# EAGLE board Watch-It-BOTTOM+ (EAGLE 9.5.1)
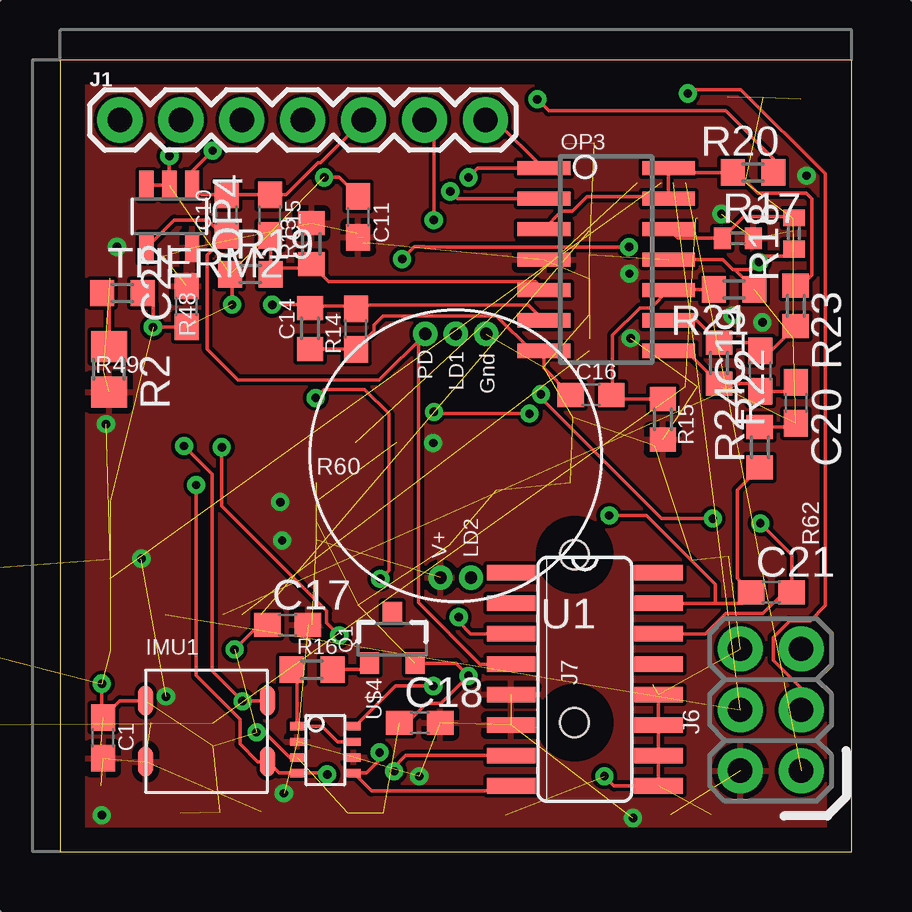
[diagram p0: board, top side]
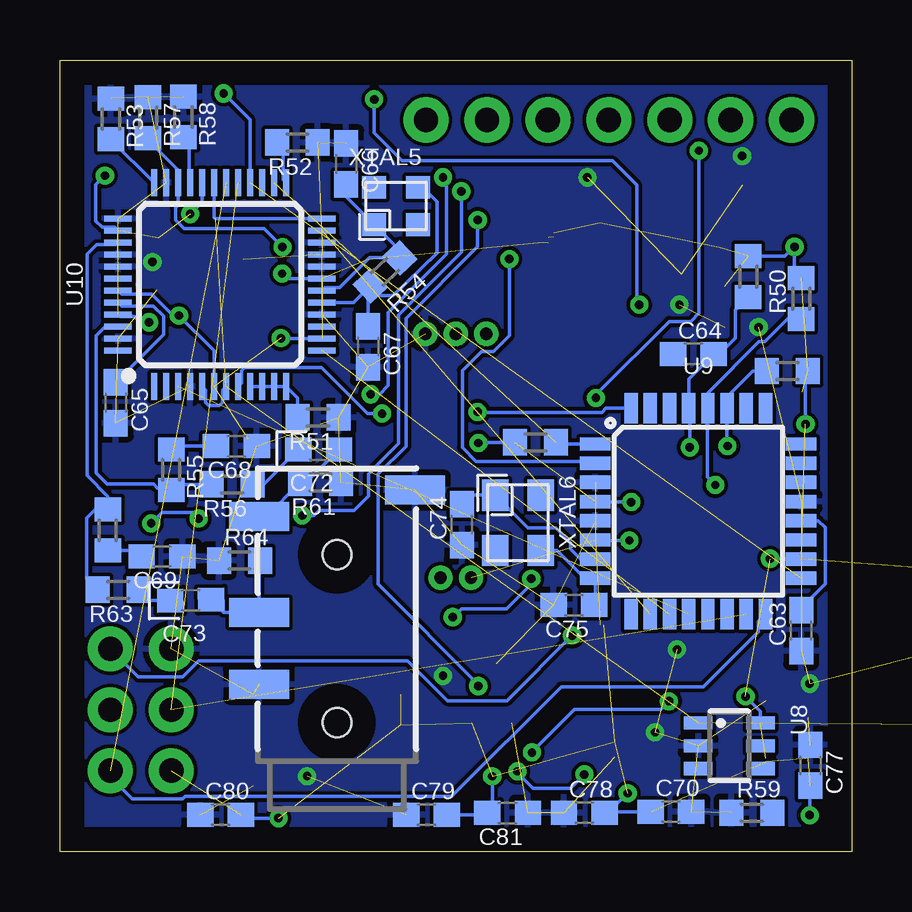
[diagram p1: board, bottom side, seen from below]

Size 33 x 33 mm. Coordinates in mm from the lower left corner, seen from the top.
Outline: 0,0 33,0 33,33 0,33 0,0
Copper layers (1*16): Top 0.035mm / dielectric 1.5mm / Bottom 0.035mm
Design rules "default": minimum track width 6mil, minimum drill 0.35mm, track to track 6mil, track to pad 6mil, pad to pad 6mil, via to via 6mil, smd to smd 6mil, copper to edge 40mil, drill to drill 6mil, minimum pad ring 10mil, minimum via ring 8mil, stop-mask expansion 4mil, vias tented up to drill 0mil, thermal gap 10mil

## Footprints (pad centres in the part's own frame; a part is rotated, then mirrored left to right if it is on the bottom)
C0603 = smd 1.1 x 1: 1 -0.85,0; 2 0.85,0
C0603.POLAR = smd 1.1 x 1: A 0.85,0; C -0.85,0
LSM6DS3_CAST = smd 0.635 x 1.27: 1 -2.54,1.27; 2 -2.54,-1.27; 3 2.54,-1.27; 4 2.54,1.27
1X07 = drill 1.016 pad 1.88: 1 0,0; 2 2.54,0; 3 5.08,0; 4 7.62,0; 5 10.16,0; 6 12.7,0; 7 15.24,0
2X3-NS = drill 1.016 pad 1.88: 1 -2.54,-1.27; 2 -2.54,1.27; 3 0,-1.27; 4 0,1.27; 5 2.54,-1.27; 6 2.54,1.27
AUDIO_JACK_3.5MM_TRRS_SMD_RA = smd 1.2 x 2.5: GND 3.2,3.25; GND/MIC 11.3,-3.25; LEFT 10.2,3.25; RIGHT 6.2,3.25 | hole 1.2: 1.6,0; 8.6,0
SO14 = smd 0.6 x 2.2: 1 -3.81,-2.6; 2 -2.54,-2.6; 3 -1.27,-2.6; 4 0,-2.6; 5 1.27,-2.6; 6 2.54,-2.6; 7 3.81,-2.6; 8 3.81,2.6; 9 2.54,2.6; 10 1.27,2.6; 11 0,2.6; 12 -1.27,2.6; 13 -2.54,2.6; 14 -3.81,2.6
SOT23-5 = smd 0.6 x 1.2: 1 -0.95,-1.306; 2 0,-1.306; 3 0.95,-1.306; 4 0.95,1.306; 5 -0.95,1.306
SOT23-3 = smd 0.8 x 0.9: 1 -0.95,-1; 2 0.95,-1; 3 0,1.1
R0805 = smd 1.3 x 1.5: 1 -0.95,0; 2 0.95,0
R0603 = smd 1 x 1.1: 1 -0.85,0; 2 0.85,0
R0402 = smd 0.7 x 0.9: 1 -0.65,0; 2 0.65,0
SO16 = smd 0.66 x 2.032: 1 -4.445,-3.073; 2 -3.175,-3.073; 3 -1.905,-3.073; 4 -0.635,-3.073; 5 0.635,-3.073; 6 1.905,-3.073; 7 3.175,-3.073; 8 4.445,-3.073; 9 4.445,3.073; 10 3.175,3.073; 11 1.905,3.073; 12 0.635,3.073; 13 -0.635,3.073; 14 -1.905,3.073; 15 -3.175,3.073; 16 -4.445,3.073
SOT23-6 = smd 0.55 x 1.2: 1 -0.95,-1.3; 2 0,-1.3; 3 0.95,-1.3; 4 0.95,1.3; 5 0,1.3; 6 -0.95,1.3
TQFP32-08 = smd 1.27 x 0.559: 1 -4.293,2.8; 2 -4.293,2; 3 -4.293,1.2; 4 -4.293,0.4; 5 -4.293,-0.4; 6 -4.293,-1.2; 7 -4.293,-2; 8 -4.293,-2.8; 17 4.293,-2.8; 18 4.293,-2; 19 4.293,-1.2; 20 4.293,-0.4; 21 4.293,0.4; 22 4.293,1.2; 23 4.293,2; 24 4.293,2.8 | smd 0.559 x 1.27: 9 -2.8,-4.293; 10 -2,-4.293; 11 -1.2,-4.293; 12 -0.4,-4.293; 13 0.4,-4.293; 14 1.2,-4.293; 15 2,-4.293; 16 2.8,-4.293; 25 2.8,4.293; 26 2,4.293; 27 1.2,4.293; 28 0.4,4.293; 29 -0.4,4.293; 30 -1.2,4.293; 31 -2,4.293; 32 -2.8,4.293
LQFP-48 = smd 0.254 x 1.143: 1 -2.75,-4.25; 2 -2.25,-4.25; 3 -1.75,-4.25; 4 -1.25,-4.25; 5 -0.75,-4.25; 6 -0.25,-4.25; 7 0.25,-4.25; 8 0.75,-4.25; 9 1.25,-4.25; 10 1.75,-4.25; 11 2.25,-4.25; 12 2.75,-4.25; 25 2.75,4.25; 26 2.25,4.25; 27 1.75,4.25; 28 1.25,4.25; 29 0.75,4.25; 30 0.25,4.25; 31 -0.25,4.25; 32 -0.75,4.25; 33 -1.25,4.25; 34 -1.75,4.25; 35 -2.25,4.25; 36 -2.75,4.25 | smd 1.143 x 0.254: 13 4.25,-2.75; 14 4.25,-2.25; 15 4.25,-1.75; 16 4.25,-1.25; 17 4.25,-0.75; 18 4.25,-0.25; 19 4.25,0.25; 20 4.25,0.75; 21 4.25,1.25; 22 4.25,1.75; 23 4.25,2.25; 24 4.25,2.75; 37 -4.25,2.75; 38 -4.25,2.25; 39 -4.25,1.75; 40 -4.25,1.25; 41 -4.25,0.75; 42 -4.25,0.25; 43 -4.25,-0.25; 44 -4.25,-0.75; 45 -4.25,-1.25; 46 -4.25,-1.75; 47 -4.25,-2.25; 48 -4.25,-2.75
PPG.MODULE.2 = drill 0.508 pad 0.94: GND 1.27,5.08; LD1 0,5.08; LD2 0.635,-5.08; PD -1.27,5.08; V+ -0.635,-5.08
SOT-23-8 = smd 0.35 x 0.6: 1 -0.991,-1.176; 2 -0.341,-1.176; 3 0.309,-1.176; 4 0.959,-1.176; 5 0.959,1.176; 6 0.309,1.176; 7 -0.341,1.176; 8 -0.991,1.176
4-SMD.NOLEAD = smd 1 x 0.95: GND1 0.925,-0.775; GND2 -0.925,0.775; XTAL1 -0.925,-0.775; XTAL2 0.925,0.775
4-SMD.NOLEAD.3.25MM-2.5MM = smd 1.3 x 1.1: GND1 1.15,-0.95; GND2 -1.15,0.95; XTAL1 -1.15,-0.95; XTAL2 1.15,0.95

## Placement (x,y rotation side)
C1  100n  [C0603]  1.79,4.74 270 top
C10  100n  [C0603]  6.95,26.53 90 top
C11  100n  [C0603]  12.44,26.46 270 top
C14  2.2n  [C0603]  12.33,21.78 90 top
C15  2.2u  [C0603]  8.75,26.53 270 top
C16  2.2u  [C0603]  22.14,19.04 0 top
C17  100n  [C0603]  9.49,9.44 0 top
C18  100n  [C0603]  15,5.37 0 top
C19  2.2n  [C0603]  29.2,20.03 90 top
C20  22u  [C0603]  30.67,18.71 270 top
C21  22n  [C0603]  29.66,10.81 0 top
C22  100n  [C0603]  5.27,22.72 90 top
C63  100n  [C0603]  2.1,9.21 90 bottom
C64  100n  [C0603]  6.59,20.74 0 bottom
C65  1u  [C0603]  30.67,18.71 270 bottom
C66  33p  [C0603]  21.07,28.67 270 bottom
C67  33p  [C0603]  20.16,21.05 270 bottom
C68  10n  [C0603]  25.64,16.91 180 bottom
C69  10n  [C0603]  28.74,12.31 180 bottom
C70  1u  [C0603]  7.53,1.67 0 bottom
C71  1u  [C0603]  -17.84,4.18 90 bottom  (outside the outline)
C72  10u  [C0603.POLAR]  22.21,16.75 180 bottom
C73  10u  [C0603.POLAR]  27.55,10.48 180.9 bottom
C74  33p  [C0603]  16.25,13.63 90 bottom
C75  33p  [C0603]  11.57,10.28 180 bottom
C76  100n  [C0603]  -8.72,10.53 90 bottom  (outside the outline)
C77  1u  [C0603]  1.72,3.6 270 bottom
C78  100n  [C0603]  11.14,1.61 0 bottom
C79  100n  [C0603]  17.72,1.54 0 bottom
C80  100n  [C0603]  26.3,1.54 0 bottom
C81  100n  [C0603]  14.34,1.61 180 bottom
C82  100n  [C0603]  -17.38,6.49 0 bottom  (outside the outline)
C83  1u  [C0603]  -15.63,5.17 0 bottom  (outside the outline)
C84  10u  [C0603.POLAR]  -10.27,8.19 0 bottom  (outside the outline)
C85  10u  [C0603.POLAR]  -9.89,5.15 90 bottom  (outside the outline)
C86  10u  [C0603.POLAR]  -19.54,3.65 90 bottom  (outside the outline)
C87  100n  [C0603]  -11.09,10.53 0 bottom  (outside the outline)
IMU1  LSM6DS3_CAST  [LSM6DS3_CAST]  6.11,5.02 0 top
J1  [1X07]  2.5,30.5 0 top
J6  AVR_SPI_PROG_3X2NS  [2X3-NS]  29.63,5.91 90 top
J7  [AUDIO_JACK_3.5MM_TRRS_SMD_RA]  21.45,3.77 90 bottom
OP3  [SO14]  22.77,24.68 270 top
OP4  [SOT23-5]  4.56,26.48 180 top
Q1  [SOT23-3]  13.86,8.85 0 top
R2  10k  [R0805]  2.05,20.11 270 top
R13  220k  [R0603]  10.48,25.34 90 top
R14  10M  [R0603]  10.43,21.81 270 top
R15  220k  [R0603]  25.14,18.02 270 top
R16  [R0603]  10.5,7.58 0 top
R17  10k  [R0402]  28.26,25.57 0 top
R18  10k  [R0402]  30.6,25.77 90 top
R19  220k  [R0603]  7.94,24.07 0 top
R20  1M  [R0603]  28.89,28.31 0 top
R21  220k  [R0603]  28.11,23.43 180 top
R22  10M  [R0603]  27.47,20.36 270 top
R23  1M  [R0603]  30.67,22.75 270 top
R24  10k  [R0603]  29.17,16.85 90 top
R48  10k  [R0603]  4.31,23.97 90 bottom
R49  10k  [R0603]  2.68,20.03 0 bottom
R50  10k  [R0603]  2.1,23.05 90 bottom
R51  100k  [R0603]  22.24,18.1 180 bottom
R52  100k  [R0603]  23.1,29.55 180 bottom
R53  100k  [R0603]  30.88,30.55 270 bottom
R54  1M  [R0603]  19.45,24.17 43.6 bottom
R55  20  [R0603]  28.36,15.91 270 bottom
R56  470  [R0603]  25.82,15.31 180 bottom
R57  100k  [R0603]  29.33,30.6 270 bottom
R58  100k  [R0603]  27.85,30.62 270 bottom
R59  100k  [R0603]  4.15,1.61 0 bottom
R60  100k  [R0603]  13.17,17.06 180 bottom
R61  10k  [R0603]  22.14,15.38 180 bottom
R62  20  [R0603]  31,13.4 90 bottom
R63  470  [R0603]  30.57,10.91 180 bottom
R64  10k  [R0603]  25.52,12.13 0 bottom
THERM2  10k  [R0603]  2.61,23.28 0 top
U1  AD5242-SO16  [SO16]  21.88,7.18 270 top
U8  [SOT23-6]  5.09,4.41 270 bottom
U9  ATMEGA328P_TQFP  [TQFP32-08]  6.39,14.19 0 bottom
U10  VS1053B  [LQFP-48]  26.33,23.64 0 bottom
U$3  [PPG.MODULE.2]  16.5,16.5 0 top
U$4  AD5171  [SOT-23-8]  11.06,4.23 270 top
XTAL5  12.288MHz  [4-SMD.NOLEAD]  18.99,26.91 0 bottom
XTAL6  8MHz  [4-SMD.NOLEAD.3.25MM-2.5MM]  13.91,13.71 270 bottom

## Library data of the parts
C1 C10 C11 C14-C22 C63-C87 R2 R13-R24 R48-R64 = LinnesLab-Passives
IMU1 THERM2 = LinnesLab-Sensors
J1 J6 U$3 = LinnesLab-Connectors
J7 = LinnesLab-Connectors; PROD_ID: CONN-10676; SF_ID: PRT-12639
OP3 OP4 = LinnesLab-AnalogIC
Q1 = LinnesLab-DiscreteSemi
U1 U$4 = LinnesLab-DigitalIC
U8 = LinnesLab-Power
U9 = LinnesLab-Microcontrollers; PROD_ID: IC-09069
U10 = LinnesLab-DigitalIC; PROD_ID: IC-12665
XTAL5 XTAL6 = LinnesLab-Clocks

## Nets
1.8V: C71.1 C82.2 C83.2 C86.A U8.1 U10.5 U10.7 U10.24 U10.31
3.3V: C1.2 C11.2 C17.2 C18.2 C22.2 C70.1 C76.2 C77.2 C78.2 C79.2 C80.2 C81.2 C84.A C85.A C87.2 IMU1.2 J6.2 OP3.4 OP4.5 R2.2 R13.2 R15.2 R17.2 R48.2 R49.2 R50.2 R60.2 U1.5 U1.6 U8.6 U9.4 U9.6 U9.18 U10.6 U10.14 U10.19 U10.32 U10.38 U10.43 U10.45 U$3.V+ U$4.2 U$4.6
A0: U9.23
A1: U9.24
A2: U9.25
A3: U9.26
A6: U9.19
A6/TIA: C10.2 C15.1 J1.5 OP4.1 U1.3
A7: U9.22
A7/PPG: C21.2 J1.7 OP3.1 U1.14
D5: U9.9
D29/LED.CTRL: J1.6 U$4.8
DTR: C64.1
G.A1: U1.2
G.A2: U1.16
G.O1: U1.1
G.O2: U1.13
G.W2: C21.1 OP3.2 R24.1 U1.15
GBUF: U10.42
GND: C1.1 C11.1 C17.1 C18.1 C22.1 C63.1 C65.2 C66.1 C67.2 C68.1 C69.1 C70.2 C71.2 C74.1 C75.2 C76.1 C77.1 C78.1 C79.1 C80.1 C81.1 C82.1 C83.1 C84.C C85.C C86.C C87.1 IMU1.1 J6.6 J7.GND J7.GND/MIC OP3.11 OP4.2 OP4.3 Q1.2 R18.1 R19.1 R21.1 R51.1 R52.1 R53.1 R57.1 R58.1 R59.1 R61.1 R64.1 THERM2.2 U1.9 U1.10 U1.11 U1.12 U8.2 U9.3 U9.5 U9.21 U10.4 U10.16 U10.20 U10.21 U10.22 U10.35 U10.37 U10.40 U10.41 U10.47 U$3.GND U$4.3
GPIO2: R58.2 U10.33
LED: Q1.3
LED.C: U$3.LD1
LEFT: R55.2 R56.2 U10.46
MIDI-RX: R60.1 U9.1 U10.26
MP3-CS: U9.10 U10.23
MP3-DCS: U9.11 U10.13
MP3-DREQ: U9.32 U10.8
MP3-EN1: U8.4
MP3-EN2: U8.3
MP3-GPIO1: R57.2 U9.2 U10.34
MP3-MISO: J6.1 U9.16 U10.30
MP3-MOSI: J6.4 U9.15 U10.29
MP3-RST: R59.2
MP3-RST-ATMEGA: C64.2 J6.5 R48.1 U9.29
MP3-RST-VS: U9.12 U10.3
MP3-RXD: U9.30
MP3-SCK: J6.3 U9.17 U10.28
MP3-SD: U9.13
MP3-TXD: U9.31
N$8: Q1.1 R16.2
N$9: R16.1 U$4.1 U$4.7
N$10: OP3.12 R17.1 R18.2
N$13: C15.2 OP3.5 R13.1 R19.2
N$15: C14.2 OP3.6 R14.1 R20.2
N$16: C14.1 C16.1 OP3.7 R14.2
N$17: C16.2 OP3.10 R15.1 R21.2
N$18: C19.2 OP3.9 R22.1 R23.2
N$19: C19.1 C20.1 OP3.8 R22.2
N$20: C20.2 R24.2
N$39: C63.2 U9.20
N$40: U9.14
N$41: C66.2 R54.2 U10.18 XTAL5.XTAL1
N$42: C67.1 R54.1 U10.17 XTAL5.XTAL2
N$43: R51.2 U10.9 U10.10 U10.11 U10.12
N$44: R52.2 U10.25
N$45: R53.2 U10.36
N$46: C65.1 U10.44
N$47: C68.2 R55.1
N$48: C72.A R56.1
N$49: C69.2 R62.1
N$50: C73.A R63.1
N$51: C74.2 U9.7 XTAL6.XTAL1
N$52: C75.1 U9.8 XTAL6.XTAL2
PD.C: C10.1 OP4.4 U1.4 U$3.PD
RIGHT: R62.2 R63.2 U10.39
SCL: IMU1.3 R50.1 U1.7 U9.28 U$4.4
SDA: IMU1.4 R49.1 U1.8 U9.27 U$4.5
SPK-L: C72.C J7.LEFT R61.2
SPK-R: C73.C J7.RIGHT R64.2
THERM: R2.1 THERM2.1
VIN: U8.5
VREF: OP3.3 OP3.13 OP3.14 R20.1 R23.1

## Tracks (layer width: path | path; a pad name or v marks a point on that pad's centre or on a via)
1.8V  (7 unrouted)
  Bottom 0.152: U10.31 26.58,26.45 26.56,26.44 | U10.24 26.51,26.39 | U10.7 26.22,19.24 26.22,18.72 26.36,18.59 26.8,18.59 26.93,18.72 26.93,19.24 U10.5
3.3V  (via drill 0.35)  (40 unrouted)
  Top 0.152: 3.57,3.89 IMU1.2 | C11.2 12.41,25.78 | C17.2 10.49,9.44 | 12.63,25.59 12.84,25.39 | 12.45,25.18 12.64,25.37
  Bottom 0.152: U9.6 10.66,12.97 v9.26,12.97 | U9.4 10.66,14.57 v9.18,14.57 | v23.79,21.4 23.77,21.39 U10.14 | U10.19 23.53,23.89 v23.74,24.09 | U10.32 27.08,27.08 v27.57,26.58 | 30.06,22.39 U10.45 30.48,22.29 29.89,22.29 29.66,22.06 v29.28,22.06 | U10.43 30.44,23.24 29.18,23.24 28.27,22.34 v28.04,22.34 26.58,20.88 U10.6 | R48.2 2.77,24.82 v2.38,25.21 2.38,24.18 R50.2 | U9.18 3.37,12.19 v3.39,12.21 | C77.2 1.74,2.72 v1.74,1.51 | U8.6 3.79,5.84 v4.42,6.47 | R49.2 1.92,19.94 v1.92,17.82 | R60.2 15.53,17.06 v15.56,17.03 | U10.38 30.72,26.03 31.24,26.03 31.5,26.29 31.5,27.8 v31.12,28.18 | C70.1 10.24,1.67 C78.2 10.15,1.62 v9.34,2.43 | C79.2 15.27,1.54 C81.2 14.98,1.83 v14.98,3.14 | C80.2 25.31,1.39 v23.89,1.39
  pour Top: 0.65,32.5 32.4,32.5 32.4,0.37 0.6,0.37
A6/TIA  (via drill 0.35)
  Top 0.152: v16.63,9.77 16.63,9.56 17.11,9.08 U1.3 | v6.37,29.22 5.51,28.36 OP4.1 5.92,27.38 C10.2 C15.1 9.43,27.38 10.76,28.71 10.87,28.71 J1.5 | v13.35,11.37 13.71,11.72 13.71,18.25 12.69,19.27 11.01,19.27 v10.66,18.91
  Bottom 0.152: v13.35,11.37 13.35,11.16 14.39,10.12 16.27,10.12 v16.63,9.77 | v6.37,29.22 6.37,22.44 6.71,22.1 7.6,22.1 10.57,19.13 10.57,19 v10.66,18.91
A7/PPG  (via drill 0.35)
  Top 0.152: U1.14 26.91,9.08 27.75,9.92 29.3,9.92 30.19,10.81 C21.2 30.51,12.37 v29.2,13.68 | OP3.1 20.16,28.49 | 20.16,28.49 17.41,28.49 v17.03,28.11 | J1.7 18.14,30.5 20.16,28.49 | v27.22,13.88 25.07,13.88 20.05,18.9 v20.05,19.06
  Bottom 0.152: v17.03,28.11 16.88,27.95 16.88,24.91 19.32,22.47 19.32,19.42 19.68,19.06 v20.05,19.06 | v29.2,13.68 28.74,14.14 27.22,14.14 v27.22,13.88
D29/LED.CTRL  (via drill 0.35)
  Top 0.152: J1.6 15.59,30.5 v15.59,26.33 | v15.56,6.9 13.98,6.9 12.31,5.22 U$4.8
  Bottom 0.152: v15.59,26.33 15.59,25.21 18.58,22.21 18.58,16.89 19.73,15.74 19.73,11.15 15.52,6.94 v15.56,6.9
G.W2  (via drill 0.35)
  Top 0.152: R24.1 28.23,15.07 28.23,11.38 C21.1 28.81,10.7 28.46,10.35 27.33,10.35 | OP3.2 16.57,27.22 v16.27,27.52 | v22.9,14.01 24.45,14.01 27.33,11.13 27.33,10.35 | 27.33,10.35 U1.15
  Bottom 0.152: v16.27,27.52 16.27,24.98 18.89,22.37 18.89,17.02 20.04,15.86 20.04,15.83 20.13,15.74 20.13,14.82 20.74,14.22 22.2,14.22 22.41,14.01 v22.9,14.01
GND  (via drill 0.35)  (57 unrouted)
  Top 0.152: IMU1.1 2.49,6.29 C1.1 1.74,5.64 v1.74,7 | Q1.2 16.51,7.85 v17.03,7.33 15.88,6.18 15.28,6.18 14.48,5.37 C18.1 | U$4.3 9.57,3.92 8.52,4.97 v8.19,4.97 | OP4.3 OP4.2 v4.56,29 | OP3.11 27.64,24.68 28.06,24.25 28.14,24.25 | 28.14,24.25 R21.1 | 28.14,24.25 28.82,24.25 v29.15,24.58 29.39,24.82 30.29,24.82 R18.1 | U1.12 U1.11 U1.10 U1.9 23.1,2.73 v22.7,3.14 | R19.1 7.18,23.98 v7.18,22.8 | C17.1 8.29,9.44 v7.28,8.42 | C22.1 3.89,21.87 v3.88,21.86 3.88,22.86 THERM2.2 | C11.1 11.63,28.11 v11.01,28.11
  pour Bottom: 32.88,32.88 32.88,0.04 0.19,0.04 0.19,32.88
GPIO2
  Bottom 0.152: R58.2 27.62,29.54 27.62,27.93 U10.33
LEFT
  Bottom 0.152: R56.2 28.12,15.3 R55.2 28.46,15.17 28.95,15.17 29.1,15.32 31.03,15.32 31.48,15.78 31.48,21.51 31.11,21.89 U10.46
MIDI-RX  (1 unrouted)
  Bottom 0.152: U9.1 12.25,16.99 R60.1
MP3-CS  (1 unrouted)
MP3-DCS  (1 unrouted)
MP3-DREQ  (via drill 0.35)
  Top 0.152: v19.57,18.25 15.66,18.25 v15.59,18.33
  Bottom 0.152: U10.8 25.43,19.53 25.43,20.05 25.3,20.19 22.1,20.19 20.17,18.25 v19.57,18.25 | U9.32 10.23,18.48 10.41,18.3 15.57,18.3 v15.59,18.33
MP3-GPIO1  (via drill 0.35)
  Top 0.152: v23.72,25.2 21.37,25.2 21.37,25.21 15.21,25.21 15.2,25.21 14.77,25.21 v14.26,24.7
  Bottom 0.152: R57.2 29.33,29.66 28.07,28.4 U10.34 28.08,26.94 28.18,26.83 28.18,26.33 27.82,25.98 24.5,25.98 v23.72,25.2 | U9.2 10.77,16.27 15.65,16.27 16.22,16.84 16.22,20.05 15.43,20.84 14.93,20.84 14.26,21.5 v14.26,24.7
MP3-MISO  (1 unrouted)
  Bottom 0.152: U9.16 3.88,9.6 3.88,9.17 6.18,6.87 12.1,6.87 16.67,2.3 27.77,2.3 27.88,2.2 29.99,2.2 30.9,3.11 J6.1
MP3-MOSI  (2 unrouted)
MP3-RST-ATMEGA  (via drill 0.35)
  Top 0.152: v11.65,9.01 11.12,9.54 11.12,10.03 6.75,14.4 v6.75,16.86
  Bottom 0.152: R48.1 4.85,22.57 4.85,21.4 5.51,20.74 C64.2 6.79,19.69 U9.29 6.75,18.44 v6.75,16.86 | J6.5 29.73,7.28 27.88,7.28 27.22,7.94 18.5,7.94 16.85,6.29 14.36,6.29 v11.65,9.01
MP3-RST-VS  (1 unrouted)
MP3-SCK  (via drill 0.35)  (1 unrouted)
  Top 0.152: J6.3 30.9,6.79 29.73,7.96 29.73,8.93 30.42,9.62 31.27,9.62 31.91,10.25 31.91,28.25 28.39,31.77 26.18,31.77 v26.18,31.61
  Bottom 0.152: v26.18,31.61 25.08,30.51 U10.28
N$8
  Top 0.152: Q1.1 12.64,7.58 R16.2
N$9
  Top 0.152: R16.1 9.89,7.35 U$4.1 10.93,5.22 11.58,4.57 U$4.7
N$10
  Top 0.152: OP3.12 25.75,25.57 R17.1 28.52,26.47 29.07,26.47 29.08,26.47 30.55,26.47 R18.2
N$13
  Top 0.152: OP3.5 19.82,23.76 11.2,23.76 R13.1 10.31,24.32 9.04,24.32 R19.2 8.79,25.64 C15.2
N$15  (via drill 0.35)
  Top 0.152: R14.1 10.48,22.66 10.4,22.73 | 10.4,22.73 12.23,22.73 C14.2 12.49,22.79 19.53,22.79 OP3.6 | R20.2 29.74,28.89 27.76,30.88 20.39,30.88 v19.9,31.36 | 10.4,22.73 10.34,22.8 v8.85,22.8
  Bottom 0.152: v19.9,31.36 19.9,29.96 18.73,28.79 9.97,28.79 8.95,27.77 8.95,22.9 v8.85,22.8
N$16
  Top 0.152: R14.2 12.31,20.96 C14.1 13.1,21.69 13.1,21.95 13.48,22.33 18.2,22.33 19.67,20.87 OP3.7 20.17,20.15 C16.1
N$17
  Top 0.152: C16.2 23.03,18.99 | 23.03,18.99 23.15,18.87 R15.1 | R21.2 25.4,23.43 OP3.10 24.63,22.67 24.18,22.67 23.03,21.52 23.03,18.99
N$18
  Top 0.152: OP3.9 26.54,22.14 R22.1 28.87,21.21 C19.2 29.66,20.88 R23.2
N$19
  Top 0.152: OP3.8 26.11,20.87 R22.2 28.87,19.51 C19.1 30.28,19.18 C20.1
N$20
  Top 0.152: R24.2 30.52,17.7 C20.2
N$39
  Bottom 0.152: C63.2 2.1,10.15 1.09,11.15 1.09,13.5 1.38,13.79 U9.20
N$41
  Bottom 0.152: XTAL5.XTAL1 19.93,26.12 | XTAL5.XTAL1 18.83,25.05 R54.2 20.09,24.76 21.34,23.51 21.96,23.51 U10.18 | C66.2 21.07,27.3 XTAL5.XTAL1 | XTAL5.XTAL1 20.14,26.14
N$42
  Bottom 0.152: XTAL5.XTAL2 17.88,27.69 17.28,27.09 17.28,24.94 19.11,23.17 19.65,23.17 R54.1 | 20.35,23.94 20.11,23.65 | 20.11,23.65 R54.1 | R54.1 20.76,22.89 U10.17 | C67.1 20.16,23.6 20.11,23.65
N$43
  Bottom 0.152: U10.9 U10.10 U10.11 U10.12 23.09,18.9 R51.2
N$44
  Bottom 0.152: R52.2 23.7,29.3 23.7,28.01 U10.25
N$45
  Bottom 0.152: R53.2 30.88,29.68 U10.36
N$46
  Bottom 0.152: 30.73,19.5 C65.1 28.68,21.55 28.68,22.31 29.11,22.74 30.44,22.74 U10.44
N$47
  Bottom 0.152: R55.1 28.22,16.91 C68.2
N$48
  Bottom 0.152: R56.1 24.51,15.3 C72.A
N$49
  Bottom 0.152: C69.2 29.84,12.56 R62.1
N$50
  Bottom 0.152: C73.A 29.28,10.47 R63.1
N$51
  Bottom 0.152: C74.2 15.87,14.86 XTAL6.XTAL1 13.49,13.48 12.33,13.48 11.72,12.88 11.72,12.61 11.3,12.19 U9.7
N$52
  Bottom 0.152: XTAL6.XTAL2 12.29,12.55 11.12,11.39 U9.8 10.68,10.31 C75.1
PD.C
  Top 0.152: U1.4 17.52,7.81 14.95,10.38 14.95,21.3 U$3.PD 13.3,19.65 7.43,19.65 6.14,20.94 6.14,24.87 6.88,25.61 | C10.1 6.88,25.61 | OP4.4 4.76,26.33 6.16,26.33 6.88,25.61
RIGHT
  Bottom 0.152: R63.2 31.88,11.37 31.88,13.91 31.54,14.25 R62.2 31,14.81 31.87,15.67 31.87,24.9 31.47,25.29 30.67,25.29 U10.39
SCL  (via drill 0.35)
  Top 0.152: U1.7 14.42,4 13.93,3.52 v13.93,3.34 | v11.14,3.21 11.08,3.27 U$4.4 9.13,3.27 IMU1.3 8.24,3.75 7.51,4.49 7.51,5.51 5.68,7.34 v5.68,15.28
  Bottom 0.152: v13.93,3.34 13.93,3.29 13.27,2.63 11.72,2.63 v11.14,3.21 | R50.1 2.67,22.2 3.62,21.25 3.86,21.25 5.99,19.12 U9.28 6.02,18.45 6.02,15.62 v5.68,15.28
SDA  (via drill 0.35)
  Top 0.152: U1.8 18.61,2.53 12.98,2.53 U$4.5 12.77,3.27 13.32,3.83 v13.32,4.13 | IMU1.4 7.63,6.29 v7.61,6.26 6.34,7.53 6.34,15.74 v5.17,16.91
  Bottom 0.152: v13.32,4.13 13.32,4.16 11.55,5.93 7.94,5.93 v7.61,6.26 | R49.1 4.12,20.03 5.19,18.96 U9.27 5.19,16.93 v5.17,16.91
SPK-L
  Bottom 0.152: J7.LEFT 24.4,13.97 R61.2 22.74,15.38 C72.C
SPK-R
  Bottom 0.152: R64.2 24.7,12.09 J7.RIGHT 26.18,9.97 C73.C
THERM
  Top 0.152: R2.1 2.05,22.99 THERM2.1
VREF
  Top 0.152: OP3.13 25.37,27.29 | 25.37,27.29 OP3.14 25.55,28.31 R20.1 28.24,28.31 29.1,27.45 31.12,27.45 31.35,27.22 31.35,24.04 30.91,23.6 R23.1 | OP3.3 20.91,26.69 21.37,26.69 21.97,27.29 25.37,27.29